# Altium PCB PBC2Asave.PcbDoc (part 1 of 2)
Units mm, origin at the board's own origin, x right, y up, seen from the top; angles counter-clockwise.
Board outline 55 x 64.5 mm, 2 copper layers (Top Layer, Bottom Layer); 77 components, 67 nets, 232 pads, 40 vias.
Unrouted connection lines stored in the file: 2.
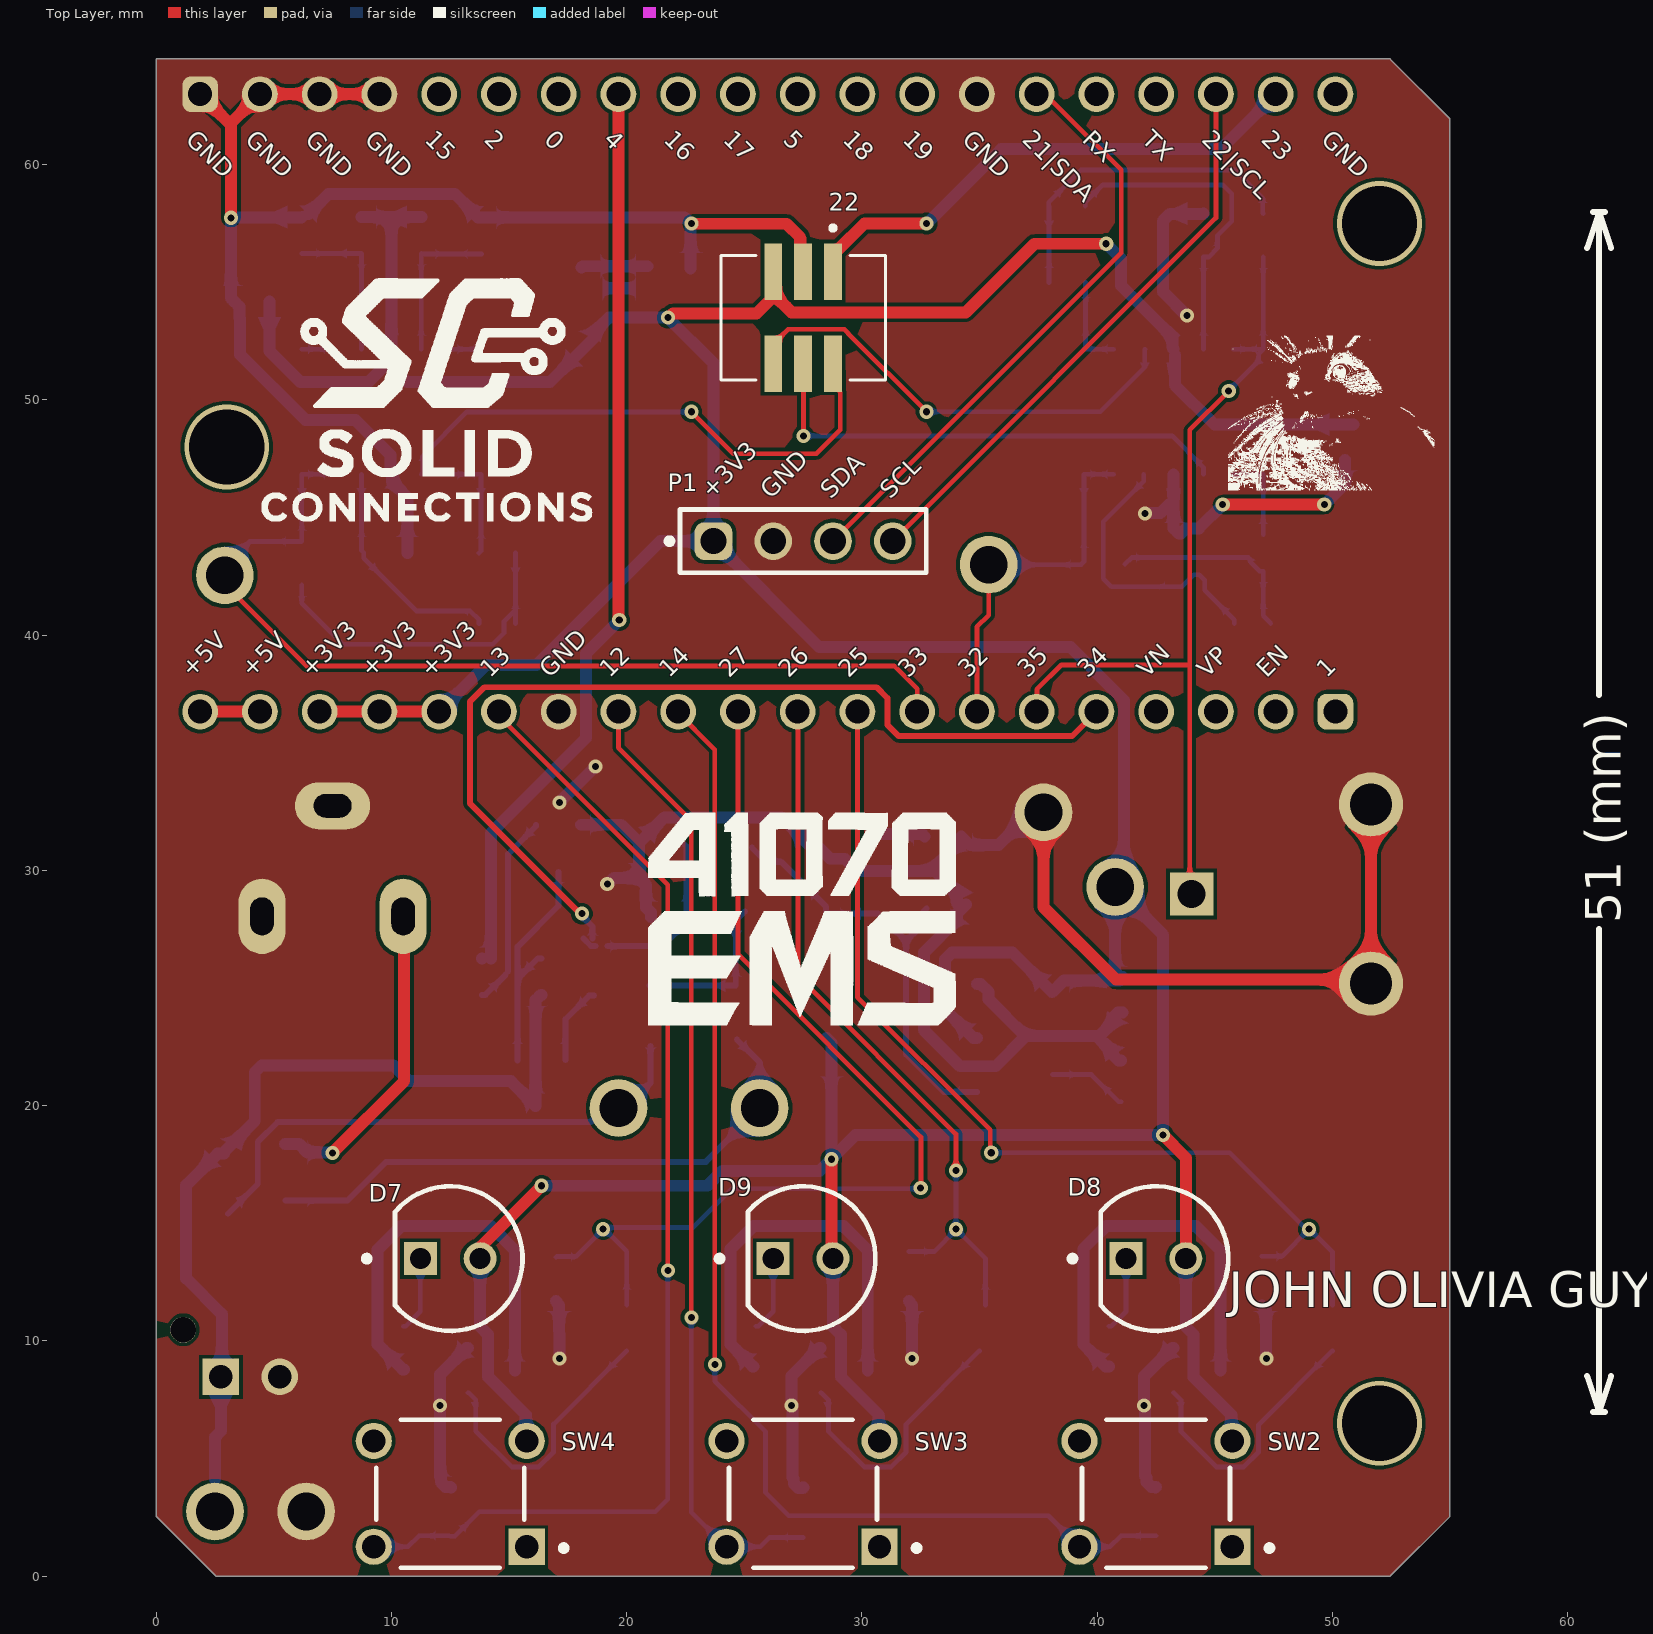
[diagram p0: Top Layer view]
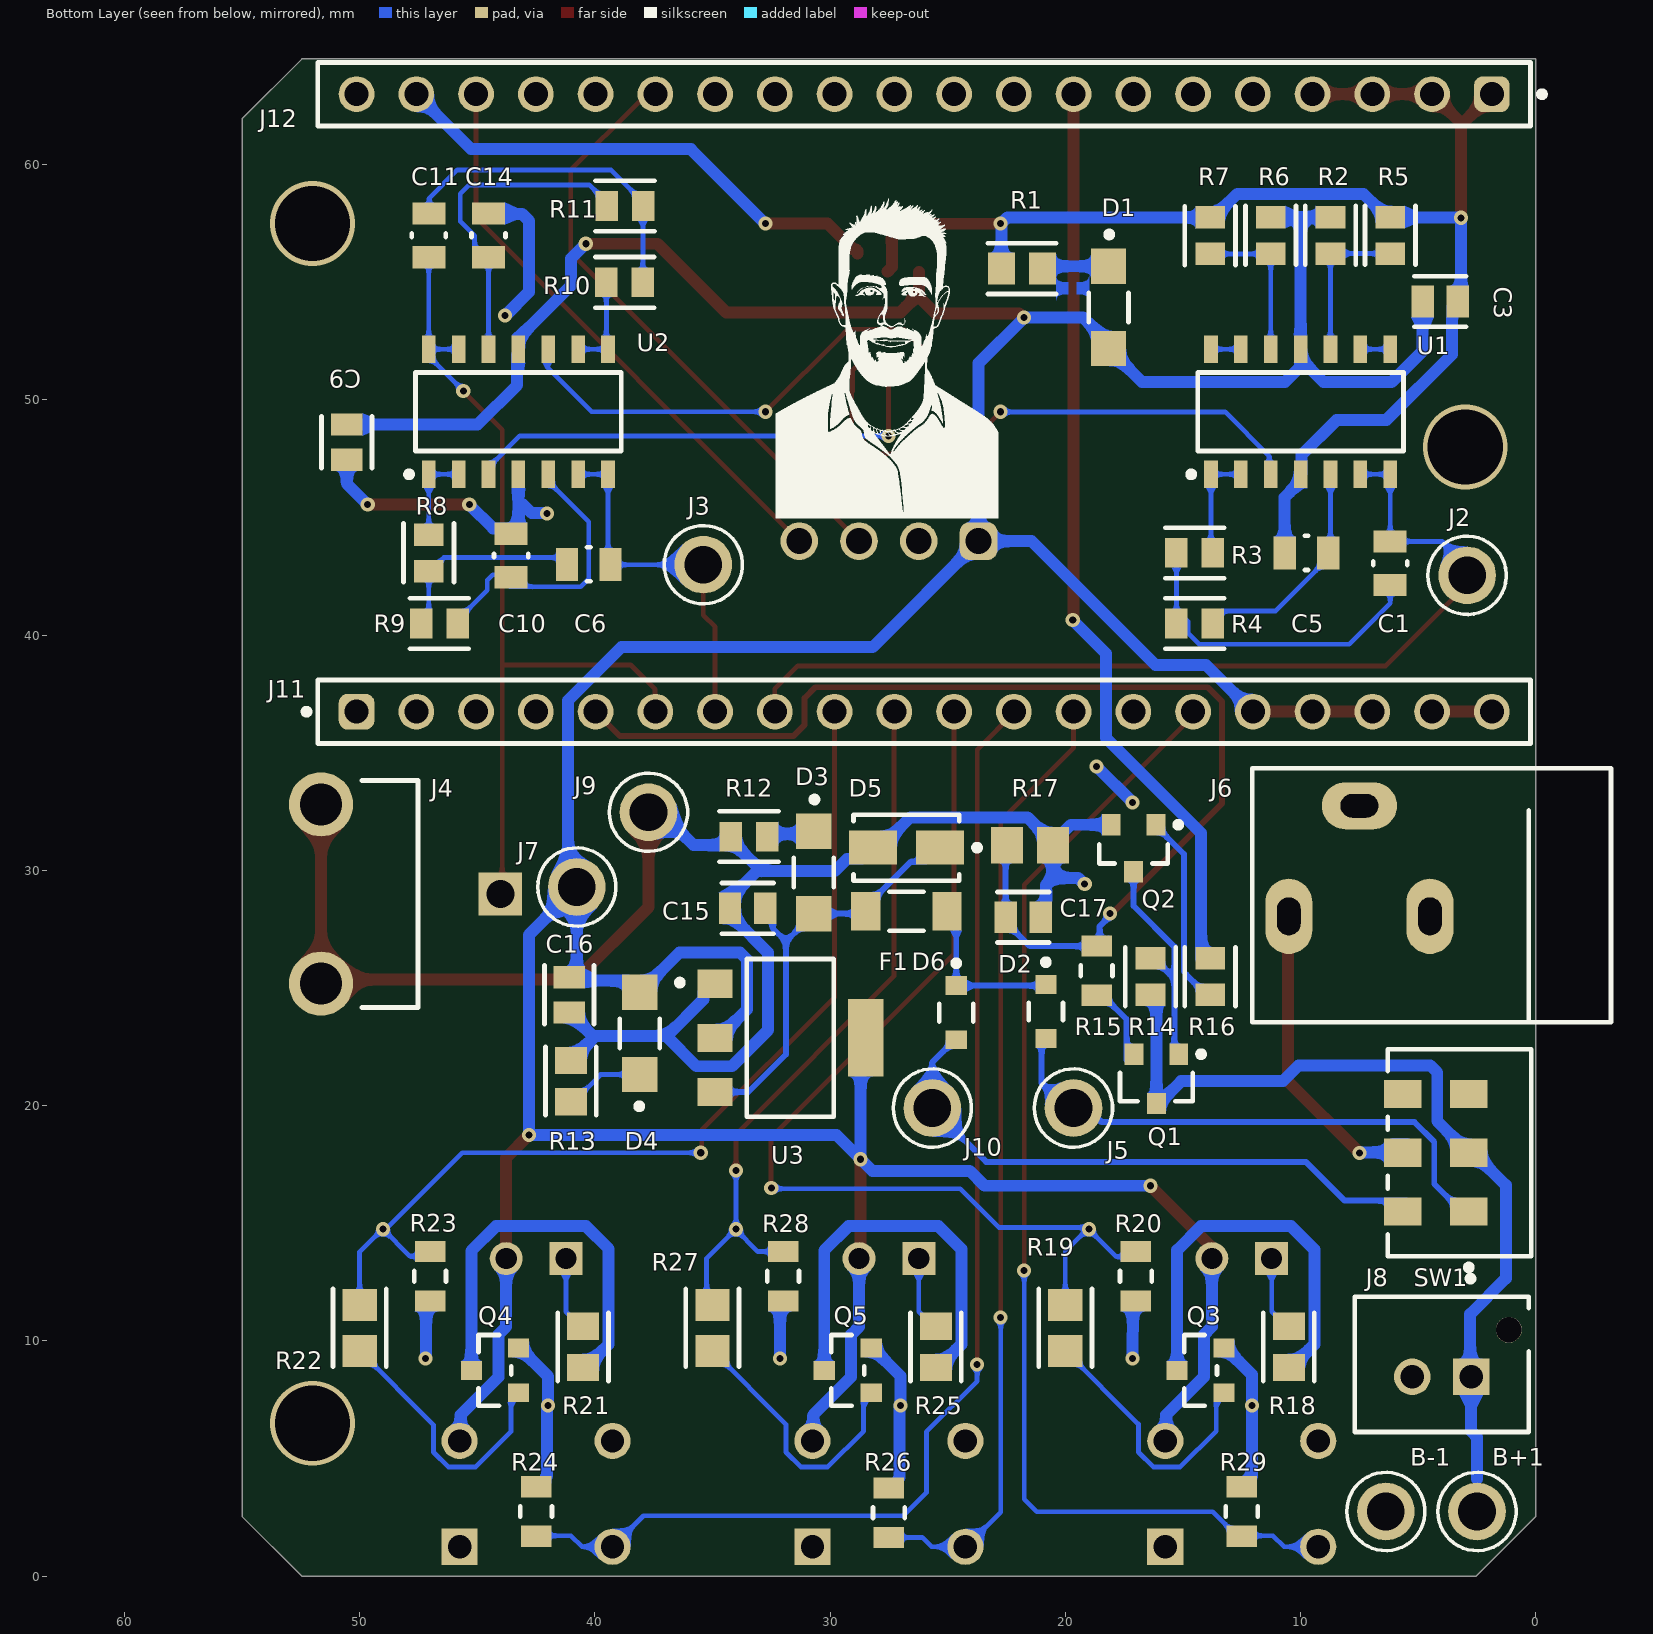
[diagram p1: Bottom Layer view, seen from below]
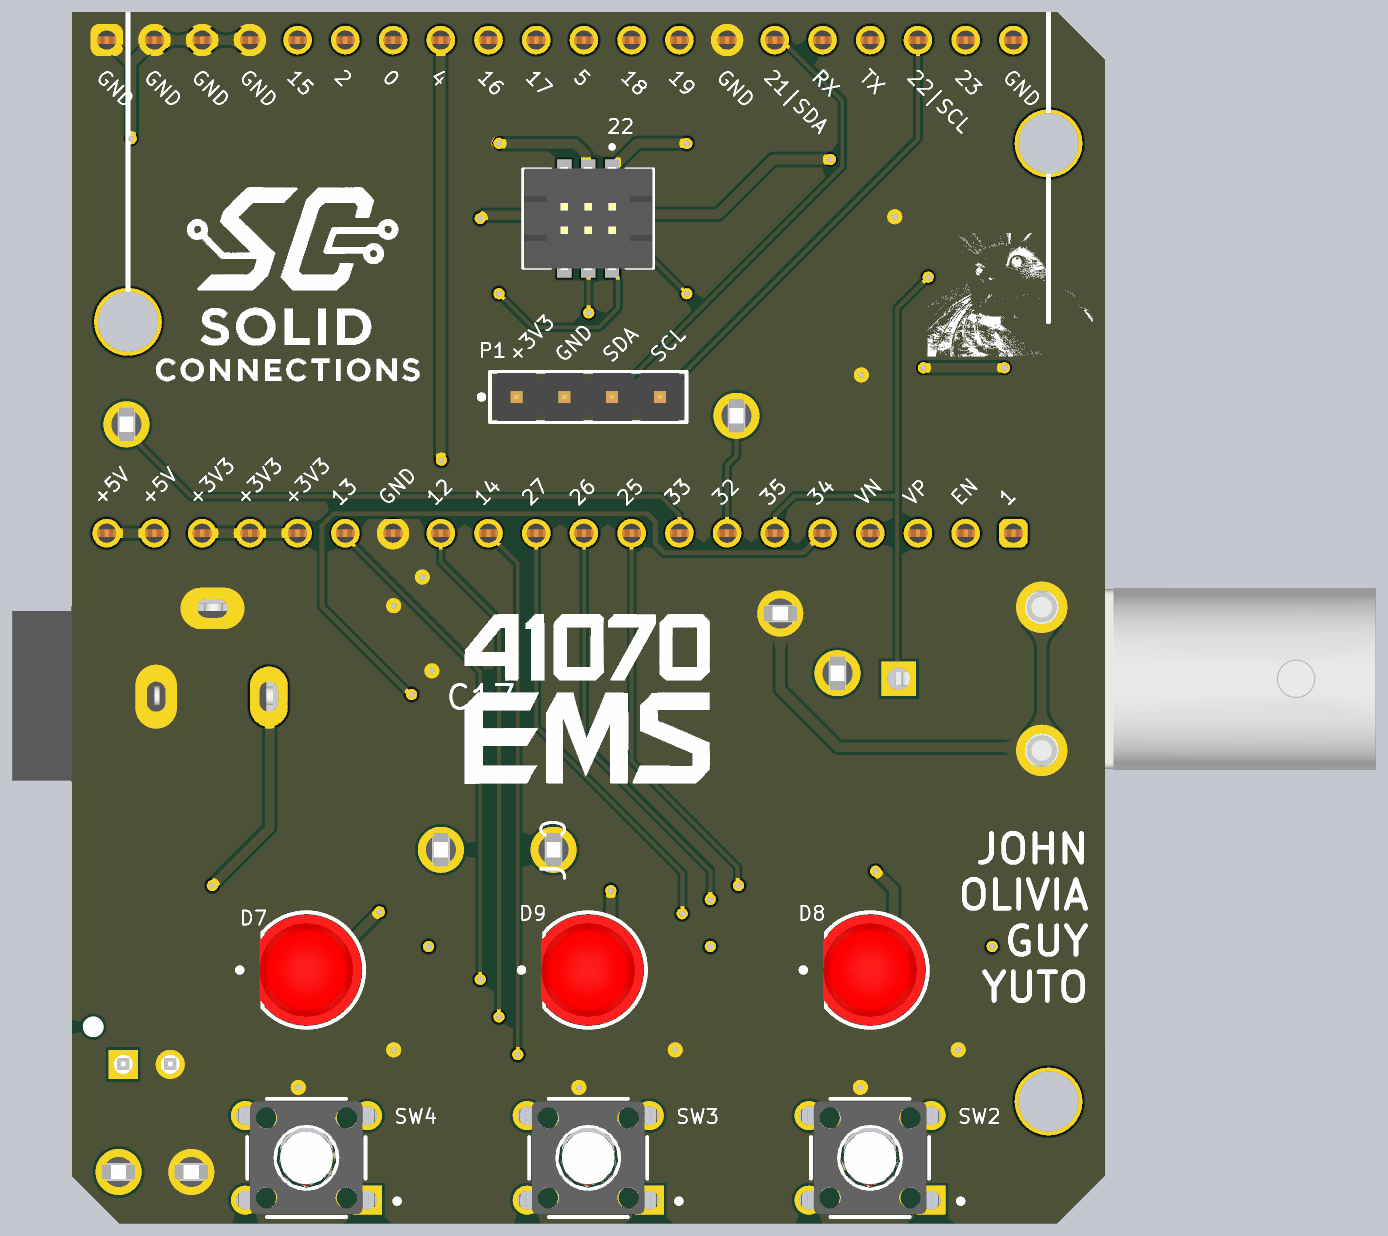
[diagram p2: 3D render of the assembled board from above, using the file's embedded part models]
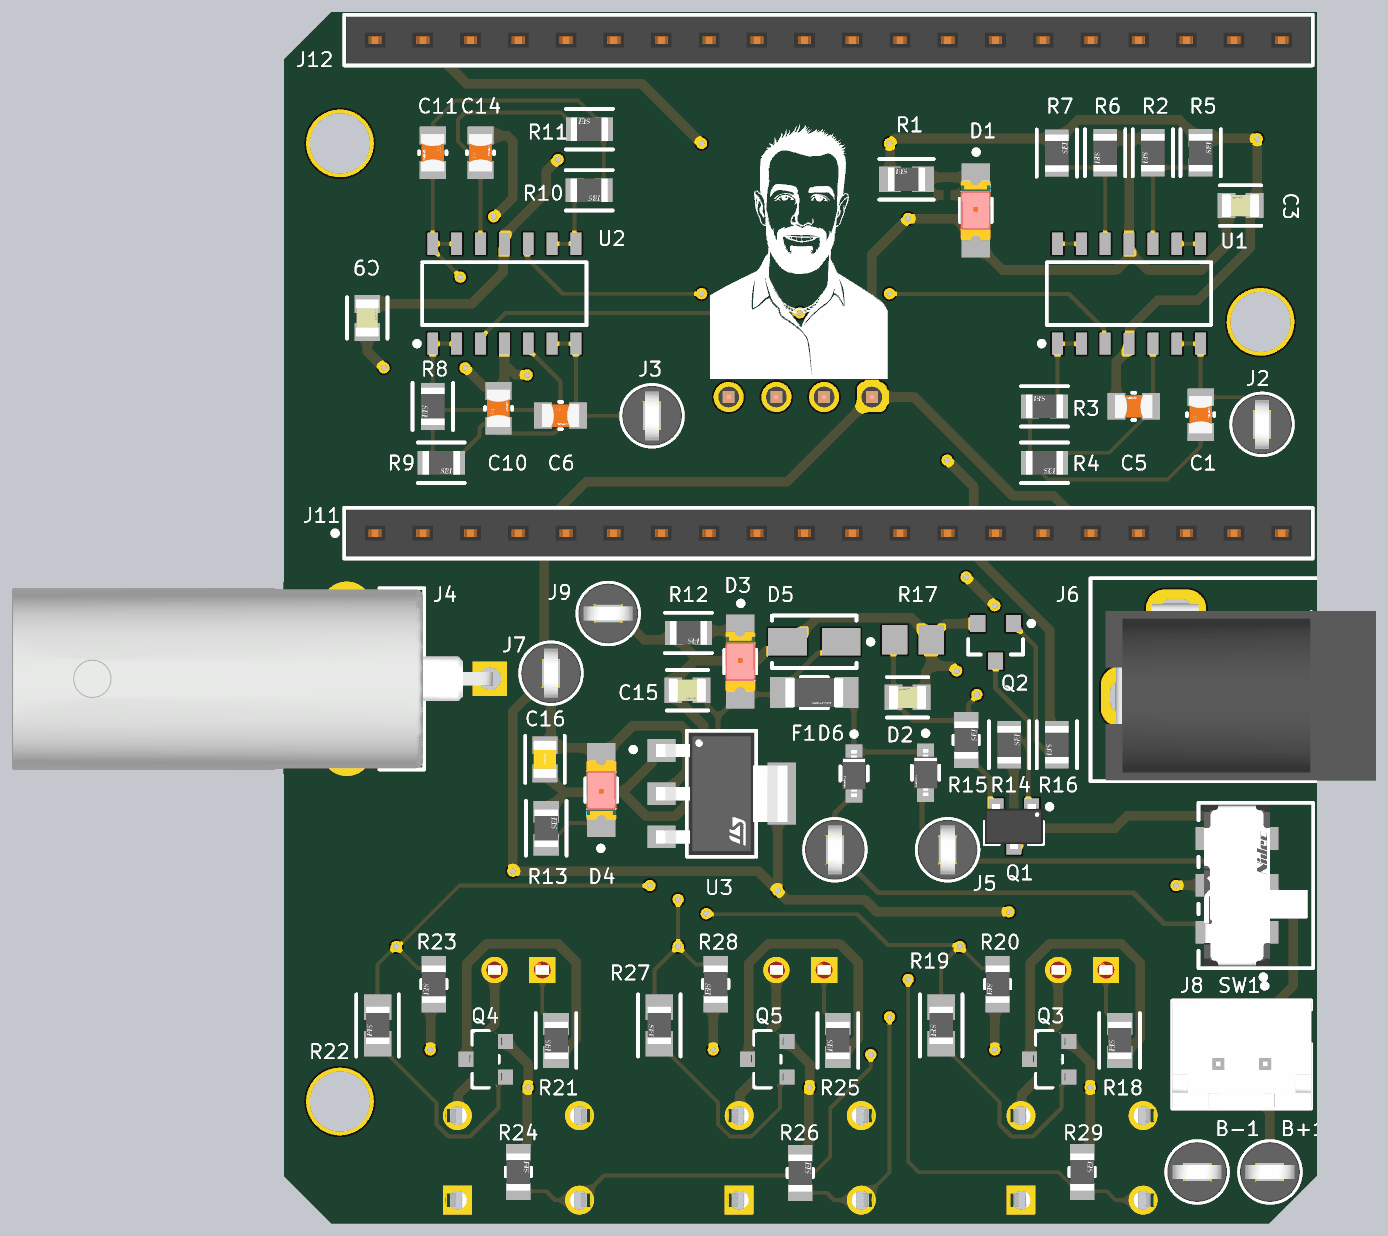
[diagram p3: 3D render of the assembled board from below, using the file's embedded part models]

## Layer stack, top to bottom
Top Solder: solder mask 0.0102, Solder Resist, Dk 3.5
Top Layer: signal copper 0.0356
Dielectric 1: dielectric 0.32, FR-4, Dk 4.8
Bottom Layer: signal copper 0.0356
Bottom Solder: solder mask 0.0102, Solder Resist, Dk 3.5

## Board outline
0,2.54 2.54,0 52.451,0 55,2.54 55,61.976 54.975,61.976 52.451,64.5 0,64.5

## Design rules (kind name [scope] priority, off if disabled: settings)
Clearance [All] p1: gap=0.152 ignorepadtopadclearanceinfootprint=FALSE
HoleSize [All] p1: absolutevalues=TRUE maxlimit=25.4 minlimit=0.2 maxpercent=80.000 minpercent=20.000
MinimumSolderMaskSliver [All] p1: minsoldermaskwidth=0.102
PolygonConnect PolygonConnect_9 [All vs IsNamedPolygon('GND_L01_P000')] p1: connectstyle=Direct reliefconductorwidth=0.254 reliefentries=4 polygonreliefangle="90 Angle" airgapwidth=0.254
PolygonConnect PolygonConnect_8 [All vs IsNamedPolygon('GND_L01_P001')] p2: connectstyle=Direct reliefconductorwidth=0.254 reliefentries=4 polygonreliefangle="90 Angle" airgapwidth=0.254
PolygonConnect PolygonConnect_7 [All vs IsNamedPolygon('GND_L01_P000')] p3: connectstyle=Relief reliefconductorwidth=0.254 reliefentries=4 polygonreliefangle="90 Angle" airgapwidth=0.254
PolygonConnect PolygonConnect_6 [All vs IsNamedPolygon('GND_L01_P004')] p4: connectstyle=Direct reliefconductorwidth=0.254 reliefentries=4 polygonreliefangle="90 Angle" airgapwidth=0.254
PolygonConnect PolygonConnect_5 [All vs IsNamedPolygon('GND_L01_P000')] p5: connectstyle=Direct reliefconductorwidth=0.254 reliefentries=4 polygonreliefangle="90 Angle" airgapwidth=0.254
PolygonConnect PolygonConnect_4 [All vs IsNamedPolygon('GND_L01_P000')] p6: connectstyle=Relief reliefconductorwidth=0.254 reliefentries=4 polygonreliefangle="90 Angle" airgapwidth=0.254
PolygonConnect PolygonConnect_3 [All vs IsNamedPolygon('GND_L01_P000')] p7: connectstyle=Direct reliefconductorwidth=0.254 reliefentries=4 polygonreliefangle="90 Angle" airgapwidth=0.254
PolygonConnect PolygonConnect_2 [All vs IsNamedPolygon('GND_L01_P000')] p8: connectstyle=Direct reliefconductorwidth=0.254 reliefentries=4 polygonreliefangle="90 Angle" airgapwidth=0.254
PolygonConnect PolygonConnect_1 [All vs IsNamedPolygon('GND_L01_P000')] p9: connectstyle=Direct reliefconductorwidth=0.254 reliefentries=4 polygonreliefangle="90 Angle" airgapwidth=0.254
PolygonConnect [All] p10: connectstyle=Relief reliefconductorwidth=0.254 reliefentries=4 polygonreliefangle="90 Angle" airgapwidth=0.254
RoutingCorners [All] p1: cornerstyle=45-Degree minsetback=0.254 maxsetback=0.254
RoutingVias [All] p1: holewidth=0.3 width=0.6 viastyle="Through Hole" minholewidth=0.3 minwidth=0.6 maxholewidth=0.3 maxwidth=0.6
SilkToSolderMaskClearance SilkscreenOverComponentPads [All] p1: minsilkscreentomaskgap=0.1 clearancetoexposedcopper=TRUE
SolderMaskExpansion [All] p1: expansion=0.102 istentingtop=FALSE
SupplyNets "Schematic Supply Nets_2" [InNet('+5V')] p1: voltage=0.000
SupplyNets "Schematic Supply Nets_1" [InNet('GND')] p2: voltage=0.000
SupplyNets "Schematic Supply Nets" [InNet('+3V3')] p3: voltage=0.000
Width "Width GND" [InNet('GND')] p1: maxlimit=0.508 minlimit=0.508 preferedwidth=0.508
Width "Width Power" [InNet('+3V3') OR InNetClass('PWR')] p2: maxlimit=0.508 minlimit=0.508 preferedwidth=0.508
Width [All] p3: maxlimit=0.508 minlimit=0.152 preferedwidth=0.203
26 further rules are at their usual default settings.

## Classes and differential pairs
component class "Top Level": J11 J12
component class Sheet4: C1 C3 C5 C6 C9 C10 C11 C14 J2 J3 J4 R2 R3 R4 R5 R6 R7 R8 R9 R10 R11 U1 U2
component class Sheet3: 22 D1 R1
component class Sheet2: B+1 B-1 C15 C16 C17 D2 D3 D4 D5 D6 F1 J5 J6 J7 J8 J9 J10 Q1 Q2 R12 R13 R14 R15 R16 R17 SW1 U3
component class r: D7 D8 D9 P1 Q3 Q4 Q5 R18 R19 R20 R21 R22 R23 R24 R25 R26 R27 R28 R29 SW2 SW3 SW4

## Components (designator, comment, footprint, x,y, rotation, side; value= is the part's Value field where it differs from the comment)
22 "20021221-00006C4LF" AMPHENOL_20021221-00006C4LF 27.5,53.5 r0 top (schematic designator J1)
B+1 "5006" FP-5006-MFG 2.5,2.75 r180 bottom
B-1 "5006" FP-5006-MFG 6.375,2.75 r180 bottom
C1 "33nF" FP-CC0805-0_85-MFG 6.19,43.061 r90 bottom value="33 nF"
C3 "0.1uF" FP-C0805C-DN-MFG 4.064,54.19 r180 bottom value="0.10 μF"
C5 "33nF" FP-CC0805-0_85-MFG 9.75,43.5 r0 bottom value="33 nF"
C6 "33nF" FP-CC0805-0_85-MFG 40.259,43.014 r180 bottom value="33 nF"
C9 "0.1uF" FP-C0805C-DN-MFG 50.546,48.209 r270 bottom value="0.10 μF"
C10 "33nF" FP-CC0805-0_85-MFG 43.561,43.395 r90 bottom value="33 nF"
C11 "33nF" FP-CC0805-0_85-MFG 47.06,57 r270 bottom value="33 nF"
C14 "33nF" FP-CC0805-0_85-MFG 44.52,57 r90 bottom value="33 nF"
C15 "0.1uF" FP-C0805C-DN-MFG 33.507,28.391 r0 bottom value="0.10 μF"
C16 "10uF" FP-C0805C106J8RACAUTO-MFG 41.09,24.714 r270 bottom
C17 "C0805C103J5RAC7210" FP-C0805C-DN-MFG 21.789,28.011 r180 bottom value="10,000 pF"
D1 "LTST-C150KRKT" FP-LTST-C150KRKT-MFG 18.161,53.936 r270 bottom
D2 "CUS08F30,H3F" FP-USC-MFG 20.828,24.003 r270 bottom
D3 "LTST-C150KRKT" FP-LTST-C150KRKT-MFG 30.691,29.916 r270 bottom
D4 "LTST-C150KRKT" FP-LTST-C150KRKT-MFG 38.09,23.075 r90 bottom
D5 "TVS" VISH-DO-214AC-2_L 26.754,30.969 r0 bottom
D6 "CUS08F30,H3F" FP-USC-MFG 24.638,23.957 r270 bottom
D7 "WP7113SURC" FP-WP7113SURC-MFG 12.5,13.5 r0 top
D8 "WP7113SURC" FP-WP7113SURC-MFG 42.5,13.5 r0 top
D9 "WP7113SURC" FP-WP7113SURC-MFG 27.5,13.5 r0 top
F1 "SF-1206S050-2" FP-SF-1206S-MFG 26.754,28.265 r0 bottom value=596mΩ
J2 "5006" FP-5006-MFG 2.921,42.545 r90 bottom
J3 "5006" FP-5006-MFG 35.39,43 r90 bottom
J4 "5414373-1" FP-5414373-1-MFG 58.5,29 r270 bottom
J5 "5006" FP-5006-MFG 19.656,19.9 r270 bottom
J6 "PJ-102AH" "CON Barrel PJ-102AH" 7.5,32.75 r0 bottom
J7 "5006" FP-5006-MFG 40.767,29.298 r90 bottom
J8 "B2B-XH-AM(LF)(SN)" FP-B2B-XH-AM_LF_SN-MFG 4,9 r180 bottom
J9 "5006" FP-5006-MFG 37.722,32.473 r0 bottom
J10 "5006" FP-5006-MFG 25.654,19.9 r270 bottom
J11 "61302011821" 61302011821 26,36.75 r180 bottom
J12 "61302011821" 61302011821 26,63 r0 bottom
P1 "61300411121" 61300411121 27.5,44 r0 top
Q1 "SSM3J328R,LF" TOSH-SOT-23F_V 16.129,21.141 r270 bottom
Q2 "MMBT3904LT1G" ONSC-SOT-23-3-318-08_V 17.102,30.943 r270 bottom
Q3 "DMN2004K-7" FP-SOT23-MFG 14.25,8.75 r0 bottom
Q4 "DMN2004K-7" FP-SOT23-MFG 44.25,8.75 r0 bottom
Q5 "DMN2004K-7" FP-SOT23-MFG 29.25,8.75 r0 bottom
R1 "300Ω" FP-RMCF0805-IPC_B 21.844,55.587 r0 bottom
R2 "100k" FP-RMCF0805-IPC_C 8.73,57 r270 bottom
R3 "100k" FP-RMCF0805-IPC_C 14.5,43.5 r0 bottom
R4 "100k" FP-RMCF0805-IPC_C 14.5,40.5 r180 bottom
R5 "100k" FP-RMCF0805-IPC_C 6.19,57 r90 bottom
R6 "100k" FP-RMCF0805-IPC_C 11.27,57 r270 bottom
R7 "100k" FP-RMCF0805-IPC_C 13.843,56.984 r90 bottom
R8 "100k" FP-RMCF0805-IPC_C 47.06,43.5 r270 bottom
R9 "100k" FP-RMCF0805-IPC_C 46.609,40.5 r180 bottom
R10 "100k" FP-RMCF0805-IPC_C 38.735,55 r180 bottom
R11 "100k" FP-RMCF0805-IPC_C 38.721,58.25 r0 bottom
R12 "RMCF0805JT3K00" FP-RMCF0805-IPC_C 33.448,31.44 r180 bottom
R13 "RMCF0805JT300R" FP-RMCF0805-IPC_B 41.021,21.043 r90 bottom
R14 "RMCF0805FG100K" FP-RMCF0805-IPC_C 16.383,25.488 r90 bottom
R15 "RMCF0805FT10K0" FP-RMCF0805-MFG 18.669,25.742 r90 bottom
R16 "RMCF0805FT1K00" FP-RMCF0805-IPC_C 13.843,25.488 r270 bottom
R17 "ERJ-6GEYJ563V" RESC2013X70X40ML20T20 21.504,31.076 r0 bottom
R18 "300Ω" FP-RMCF0805-IPC_B 10.5,9.75 r270 bottom
R19 "100Ω" FP-RMCF0805-IPC_A 20,10.551 r270 bottom
R20 "10k" FP-RMCF0805-MFG 17,12.75 r270 bottom
R21 "300Ω" FP-RMCF0805-IPC_B 40.5,9.75 r270 bottom
R22 "100Ω" FP-RMCF0805-IPC_A 50,10.551 r270 bottom
R23 "10k" FP-RMCF0805-MFG 47,12.75 r270 bottom
R24 "10k" FP-RMCF0805-MFG 42.5,2.75 r90 bottom
R25 "300Ω" FP-RMCF0805-IPC_B 25.5,9.75 r270 bottom
R26 "10k" FP-RMCF0805-MFG 27.5,2.695 r90 bottom
R27 "100Ω" FP-RMCF0805-IPC_A 35,10.551 r270 bottom
R28 "10k" FP-RMCF0805-MFG 32,12.75 r270 bottom
R29 "10k" FP-RMCF0805-MFG 12.5,2.75 r90 bottom
SW1 "CL-SB-22A-11T" FP-CL-SB-22A-11T-MFG 3.25,18 r90 bottom
SW2 "2-1825910-7" FP-2-1825910-7-MFG 42.5,3.5 r270 top
SW3 "2-1825910-7" FP-2-1825910-7-MFG 27.5,3.5 r270 top
SW4 "2-1825910-7" FP-2-1825910-7-MFG 12.5,3.5 r270 top
U1 "LM324DR2G" ONSC-SOIC-14-751A-03_V 10,49.5 r90 bottom
U2 "LM324DR2G" ONSC-SOIC-14-751A-03_V 43.25,49.5 r90 bottom
U3 "LD1117S33CTR" FP-SOT-223-0046067_14-MFG 31.689,22.883 r180 bottom

## Footprints (in the part's own frame and the unit in brackets; to place one, negate y for a bottom-side part, rotate by r counter-clockwise, add the part's x,y. Pads: shape width x height; smd on the part's side, far side on the other; paste and mask are expansions set on the pad)
61300411121 [mm] "Pin Header, pitch 2.54 mm, THT, Vertical, single row, 4p"
  rrect50% 1.6x1.6 hole 1.1: 1(-3.81,0)
  round 1.6 hole 1.1: 2(-1.27,0) 3(1.27,0) 4(3.81,0)
  silkscreen extent -5.8,-1.35 5.23,1.34, body extent -5.08,-1.27 5.08,1.27, height 8.57
61302011821 [mm] "Socket Header, Pitch 2.54 mm, THT, Vertical, single row, 20p"
  rrect50% 1.52x1.52 hole 1.02: 1(-24.13,0)
  round 1.52 hole 1.02: 2(-21.59,0) 3(-19.05,0) 4(-16.51,0) 5(-13.97,0) 6(-11.43,0) 7(-8.89,0) 8(-6.35,0) 9(-3.81,0) 10(-1.27,0) 11(1.27,0) 12(3.81,0) 13(6.35,0) 14(8.89,0) 15(11.43,0) 16(13.97,0) 17(16.51,0) 18(19.05,0) 19(21.59,0) 20(24.13,0)
  silkscreen extent -26.39,-1.35 25.78,1.35, body extent -25.65,-1.25 25.65,1.25, height 8.55
AMPHENOL_20021221-00006C4LF [mm]
  rect 0.76x2.4 smd: 1(1.27,1.95) 2(1.27,-1.95) 3(0,1.95) 4(0,-1.95) 5(-1.27,1.95) 6(-1.27,-1.95)
  silkscreen extent -3.5,-2.65 3.5,3.91, body extent -3.4,-2.75 3.4,2.75, height 5.6
"CON Barrel PJ-102AH" [mm] "5.5mm Barrel Plug (2.1mm ID)"
  oval 2x3.2 hole 1.6 slot 1 at 0 deg: 1(3,4.7) 2(-3,4.7)
  oval 3.2x2 hole 1 slot 1.6 at 0 deg: 3(0,0)
  silkscreen extent -10.7,-1.6 4.55,9.2, body extent -10.65,-0.25 3.75,9.15, height 11.01
FP-2-1825910-7-MFG [mm]
  rect 1.54x1.54 hole 0.99 paste-2539.97 mask+0: 1(2.25,3.25)
  round 1.54 hole 0.99 paste-2539.97 mask+0: 2(2.25,-3.25) 3(-2.25,3.25) 4(-2.25,-3.25)
  silkscreen extent -3.14,-3.14 3.15,4.95, body extent -3.24,-4.12 3.24,4.12, height 0.25
FP-5006-MFG [mm]
  round 2.45 hole 1.6 paste-2539.97 mask+0: 1(0,0)
  silkscreen extent -1.67,-1.66 1.66,1.66, body extent -1.58,-1.59 1.58,1.59, height 5.74
FP-5414373-1-MFG [mm]
  rect 1.84x1.84 hole 1.19 paste-2539.97 mask+0: 1(0,14.48)
  round 2.73 hole 1.78 paste-2539.97 mask+0: 2(-3.81,6.86) 3(3.81,6.86)
  silkscreen extent -4.83,8.6 4.83,10.98, body extent -4.83,-10.92 4.83,14.63, height 9.34
FP-B2B-XH-AM_LF_SN-MFG [mm]
  rect 1.55x1.55 hole 1 paste-2539.97 mask+0: 1(1.25,-0.525)
  round 1.55 hole 1 paste-2539.97 mask+0: 2(-1.25,-0.525)
  round 1.1 hole 1.1 unplated paste-2539.97 mask+0: ""(2.85,1.475)
  silkscreen extent -3.7,-2.88 3.7,3.77, body extent -3.7,-2.88 3.7,2.88, height 7
FP-C0805C106J8RACAUTO-MFG [mm]
  rect 0.95x1.35 smd paste+0 mask+0: 1(-0.75,0) 2(0.75,0)
  silkscreen extent -1.25,-1.05 1.25,1.05, body extent -1,-0.63 1,0.63, height 1.45
FP-C0805C-DN-MFG [mm]
  rect 0.95x1.35 smd paste+0 mask+0: 1(-0.75,0) 2(0.75,0)
  silkscreen extent -1.1,-1.07 1.1,1.07, body extent -1,-0.63 1,0.63, height 0.88
FP-CC0805-0_85-MFG [mm]
  rect 0.95x1.4 smd paste+0 mask+0: 1(-0.925,0) 2(0.925,0)
  silkscreen extent -0.07,-0.73 0.08,0.72, body extent -1,-0.63 1,0.63, height 0.95
FP-CL-SB-22A-11T-MFG [mm]
  rect 1.2x1.6 smd paste+0 mask+0: 1(-2.5,-0.4) 2(0,-0.4) 3(2.5,-0.4) 4(-2.5,2.4) 5(0,2.4) 6(2.5,2.4)
  silkscreen extent -5,-3.05 4.4,3.05, body extent -4.25,-2.75 4.25,2.75, height 3.8
FP-LTST-C150KRKT-MFG [mm]
  rect 1.5x1.5 smd paste+0 mask+0: 1(-1.75,0) 2(1.75,0)
  silkscreen extent -3.22,-0.85 0.62,0.85, body extent -1.6,-0.8 1.6,0.8, height 1.2
FP-RMCF0805-IPC_A [mm]
  rect 1.355x1.462 smd paste+0 mask+0: 1(-0.976,0) 2(0.976,0)
  silkscreen extent -1.65,-1.13 1.65,1.13, body extent -1,-0.63 1,0.63, height 0.65
FP-RMCF0805-IPC_B [mm]
  rect 1.155x1.362 smd paste+0 mask+0: 1(-0.876,0) 2(0.876,0)
  silkscreen extent -1.45,-1.08 1.45,1.08, body extent -1,-0.63 1,0.63, height 0.65
FP-RMCF0805-IPC_C [mm]
  rect 0.955x1.262 smd paste+0 mask+0: 1(-0.776,0) 2(0.776,0)
  silkscreen extent -1.25,-1.07 1.25,1.08, body extent -1,-0.63 1,0.63, height 0.65
FP-RMCF0805-MFG [mm]
  rect 0.9x1.3 smd paste+0 mask+0: 1(-1.05,0) 2(1.05,0)
  silkscreen extent -0.23,-0.67 0.22,0.67, body extent -1,-0.63 1,0.63, height 0.65
FP-SF-1206S-MFG [mm]
  rect 1.25x1.65 smd paste+0 mask+0: 1(-1.725,0) 2(1.725,0)
  silkscreen extent -0.73,-0.82 0.73,0.82, body extent -1.55,-0.77 1.55,0.77, height 0.7
FP-SOT23-MFG [mm]
  rect 0.9x0.8 smd paste+0 mask+0: 1(-1,0.95) 2(-1,-0.95) 3(1,0)
  silkscreen extent -0.7,-1.5 0.7,1.5, body extent -1.2,-1.46 1.2,1.44, height 1.1
FP-SOT-223-0046067_14-MFG [mm]
  rect 1.5x1.2 smd paste+0 mask+0: 1(-3.2,2.3) 2(-3.2,0) 3(-3.2,-2.3)
  rect 1.5x3.3 smd paste+0 mask+0: 4(3.2,0)
  silkscreen extent -4.83,-3.35 1.85,3.35, body extent -3.5,-3.25 3.5,3.25, height 1.9
FP-USC-MFG [mm]
  rect 0.8x0.9 smd paste+0 mask+0: 1(-1.15,0) 2(1.15,0)
  silkscreen extent -2.22,-0.73 0.38,0.72, body extent -1.25,-0.63 1.25,0.63, height 1.15
FP-WP7113SURC-MFG [mm]
  rect 1.4x1.4 hole 0.9 paste-2539.97 mask+0: 1(-1.27,0)
  round 1.4 hole 0.9 paste-2539.97 mask+0: 2(1.27,0)
  silkscreen extent -3.67,-3.07 3.07,3.07, body extent -2.5,-2.95 2.94,2.95, height 9.85
ONSC-SOIC-14-751A-03_V [mm] "SOIC, 14-Leads, Body 8.75x4mm, Pitch 1.27mm"
  rect 1.18x0.58 smd: 1(-2.66,3.81) 2(-2.66,2.54) 3(-2.66,1.27) 4(-2.66,0) 5(-2.66,-1.27) 6(-2.66,-2.54) 7(-2.66,-3.81) 8(2.66,-3.81) 9(2.66,-2.54) 10(2.66,-1.27) 11(2.66,0) 12(2.66,1.27) 13(2.66,2.54) 14(2.66,3.81)
  silkscreen extent -2.78,-4.38 1.67,4.78, body extent -2,-4.38 2,4.38, height 1.75
ONSC-SOT-23-3-318-08_V [mm] "SOT23, 3-Leads, Body 2.92x1.3mm, Pitch 0.95mm"
  rect 0.9x0.8 smd: 1(-1,0.95) 2(-1,-0.95) 3(1,0)
  silkscreen extent -1.12,-1.46 0.65,2.02, body extent -0.65,-1.46 0.65,1.46, height 1.11
RESC2013X70X40ML20T20 [mm] "Chip Resistor, 2-Leads, Body 2.00x1.25mm, IPC Low Density"
  rect 1.35x1.55 smd: 1(-0.975,0) 2(0.975,0)
  body extent -1.1,-0.72 1.1,0.72, height 0.7
TOSH-SOT-23F_V [mm] "SOTFL, 3-Leads, Body 3.1x1.9mm, Pitch 0.95mm"
  rect 0.9x0.8 smd: 1(-1.05,0.95) 2(-1.05,-0.95) 3(1.05,0)
  silkscreen extent -1.17,-1.55 0.95,2.02, body extent -1.2,-1.55 1.2,1.55, height 0.88
VISH-DO-214AC-2_L [mm] "DO-214AC, 2-Leads, Body 4.5x2.79mm, IPC High Density"
  rect 2.05x1.45 smd: 1(-1.425,0) 2(1.425,0)
  silkscreen extent -3.12,-1.4 2.25,1.4, body extent -2.25,-1.4 2.25,1.4, height 2.29

## Part data
22: Package=None, Availability=Unavailable, MF="Amphenol ICC", MP=20021221-00006C4LF, Price=None
B+1 B-1 J2 J3 J5 J7 J9 J10: library part CMP-19636-000022-1, "PC TEST POINT COMPACT BLACK", Color=Black, Flammability Rating="UL94 V-0", Package Quantity=100, Body Material=Bronze, Contact Material=Bronze, Contact Plating=Tin, Height=0.35inch, Hole Diameter=1.6mm, Housing Color=Black, Inside Diameter=1.78mm, Insulation Material=Nylon, Lead Free="Lead Free", Length=8.89mm, Material=Nylon, Mount=PCB, Number of Ports=1, Orientation=Straight, Outside Diameter=3.18mm, Packaging=Bulk, Plating=Silver, REACH SVHC="No SVHC", RoHS Compliant=Yes, Series=THM
C1 C5 C6 C10 C11 C14: library part CMP-03422-000099-1, "CAP CER 0.033UF 50V X7R 0805, CC0805KRX7R9BB333", Capacitance="33 nF", Manufacturer=Yageo, Manufacturer Part Number=CC0805KRX7R9BB333, Package=CC0805-0.85, Temperature="-30°C to +85°C", Temperature Characteristic=X7R, Temperature Range High=+85°C, Temperature Range Low=-30°C, Tolerance=0.1, Voltage Rating="50 V", Automotive=No, Category=Cap, ComponentLink2Description=Datasheet, ComponentLink2URL=http://www.yageo.com/documents/recent/UPY-GPHC_Y5V_6.3V-to-50V_8.pdf, Device Class L1="Passive Components", Device Class L2=Capacitors, Device Class L3="Ceramic Capacitors", Digikey Description="CAP CER 0.033UF 50V X7R 0805", Footprint Url=http://www.yageo.com/exep/pages/download/literatures/UPY-C_GEN_24.pdf, Height=0.95mm, Ipc Land Pattern Name=CAPC200125X85, Lead Free=Yes, Material=Ceramic, Mouser Description="Multilayer Ceramic Capacitors MLCC - SMD/SMT 33nF 50V X7R 10%", Octopart=https://octopart.com/cc0805krx7r9bb333-yageo-42333931, RoHS=TRUE
C3 C9 C15: library part CMP-03020-000950-1, "CAP CER 0.1UF 50V X7R 0805", Capacitance="0.10 μF", Manufacturer=KEMET, Manufacturer Part Number=C0805C104J5RACTU, Package=C0805C-DN, Temperature="-55°C to +125°C", Temperature Characteristic=X7R, Temperature Coefficient=30ppm/°C, Temperature Range High=+125°C, Temperature Range Low=-55°C, Tolerance=0.05, Voltage Rating="50 V", Automotive=No, Category=Cap, ComponentLink2Description=Datasheet, ComponentLink2URL=https://content.kemet.com/datasheets/KEM_C1003_C0G_SMD.pdf, Device Class L1="Passive Components", Device Class L2=Capacitors, Device Class L3="Ceramic Capacitors", Digikey Description="CAP CER 0.1UF 50V X7R 0805", Height=0.88mm, Ipc Land Pattern Name=CAPC200125X78, Lead Free=Yes, Material=Ceramic, Mouser Description="Multilayer Ceramic Capacitors MLCC - SMD/SMT 50volts 0.1uF X7R 5%", Octopart=https://octopart.com/c0805c104j5ractu-kemet-104634, RoHS=TRUE
C16: library part CMP-03020-034708-1, "CAP CER 10UF 10V X7R 0805", Case Code (Imperial)=0805, Case Code (Metric)=2012, Max Operating Temperature=125°C, Min Operating Temperature=-55°C, Ratings=AEC-Q200, Tolerance=5%, Voltage Rating=10V, Capacitance=10uF, Case/Package=0805, Mount="Surface Mount", Packaging="Tape and Reel", RoHS Compliant=Yes
C17: library part CMP-2007-01173-3, "CAP CER SMD 0805 .01UF X7R 5% 50", Capacitance="10,000 pF", Manufacturer=KEMET, Package=C0805C-DN, Temperature="-55°C to +125°C", Temperature Characteristic=X7R, Temperature Coefficient=30ppm/°C, Temperature Range High=+125°C, Temperature Range Low=-55°C, Tolerance=0.05, Voltage Rating="50 V", Automotive=No, Category=Cap, ComponentLink2Description=Datasheet, ComponentLink2URL=https://content.kemet.com/datasheets/KEM_C1003_C0G_SMD.pdf, Device Class L1="Passive Components", Device Class L2=Capacitors, Device Class L3="Ceramic Capacitors", Digikey Description="CAP CER SMD 0805 .01UF X7R 5% 50", Height=0.88mm, Ipc Land Pattern Name=CAPC200125X78, Lead Free=Yes, Manufacturer Part Number=C0805C103J5RAC7210, Material=Ceramic, Mouser Description="Cap Ceramic 0.01uF 50V X7R 5% Pad SMD 0805 125C T/R", Octopart=https://octopart.com/c0805c103j5rac7210-kemet-3921106, RoHS=TRUE
D1 D3 D4: library part CMP-2000-06617-2, "LED RED CLEAR 1206 SMD", Case Code (Imperial)=1206, Case Code (Metric)=3216, Color=Red, Forward Current=30mA, Forward Voltage=2V, Lens Color=Colorless, Max Operating Temperature=85°C, Min Operating Temperature=-30°C, Package Quantity=1, Power Dissipation=62.5mW, Power Rating=75mW, Reverse Voltage=5V, Test Current=20mA, Case/Package=1206, Depth=1.6mm, Dominant Wavelength=631nm, Height=1.1mm, Illumination Color=Red, Lead Free="Lead Free", Length=3.2mm, Lens Style=Diffused, Lens Transparency=Clear, Luminous Intensity=54mcd, Mount="Surface Mount", Number of Elements=1, Number of LEDs=1, Number of Pins=2, Packaging="Tape and Reel", Radiation Hardening=No, Viewing Angle=130°, Wavelength=639nm, Width=1.6mm
D2 D6: library part CMP-00375-53632863-1, "CUS08F30,H3F Rectifier Diode, Schottky, 1 Phase, 1 Element, 0.8A, 30V V(RRM), Silicon", Average Rectified Current=800mA, Capacitance=170pF, Case/Package=SOD, Max Forward Surge Current (Ifsm)=5A, Max Junction Temperature (Tj)=125°C, Max Repetitive Reverse Voltage (Vrrm)=30V, Min Operating Temperature=-55°C, Peak Reverse Current=50µA, Contact Plating="Silver, Tin", Element Configuration=Single, Forward Current=800mA, Height=1.15mm, Max Operating Temperature=125°C, Max Reverse Voltage (DC)=30V, Mount="Surface Mount", NexarPartId=53632863, Number of Pins=2, Packaging=Digi-Reel®, Peak Non-Repetitive Surge Current=5A, Reverse Voltage=30V, RoHS=Compliant, Schedule B="8541100080, 8541100080"
D5: library part CMP-0548-00238-2, "Transient Voltage Suppressor, 6.40 to 231 V, 10 V Stand-off Voltage, Uni-Directional, -55 to 155 degC, 2-pin DO-214AC, Pb-Free, Tape and Reel", Manufacturer="Vishay Semiconductor", Operating Junction and Storage Temperature Range="-55 to 150 degC", PartNumber=SMAJ10A-E3/61, ComponentLink1Description="Manufacturer URL", ComponentLink1URL=http://www.vishay.com/, ComponentLink2Description=Datasheet, ComponentLink2URL=http://www.vishay.com/docs/88390/smaj50a.pdf, ComponentLink3Description="Package Specification", ComponentLink3URL=http://www.vishay.com/docs/88390/smaj50a.pdf, DatasheetVersion=12/8/2013, ID (uA)=1, IFSM="40 A", Mounting Technology="Surface Mount", PackageDescription="2-Pin DO-214AC (SMA), Body 4.245 x 2.665 mm", PackageReference=DO-214AC-2, Packing="Tape and Reel", PPPM (W)="400, 300", RoHS=TRUE, VBR Uni-Directional (V)="6.4 to 231", VWM (V)=10
D7 D8 D9: library part CMP-00682-00869413-1, "WP7113SURC Red 5 mm 20 º Water Clear 3800 mcd 1.9 V Solid State LED Lamp - T-1 3/4", Case/Package=Radial, Color=Red, Forward Current=20mA, Forward Voltage=1.9V, Max Junction Temperature (Tj)=115°C, Max Operating Temperature=85°C, Min Operating Temperature=-40°C, Power Dissipation=75mW, Reverse Voltage=5V, Dominant Wavelength=630nm, Height=8.6mm, Illumination Color=Red, Lead Free="Lead Free", Lens Style="Clear, Dome", Luminous Intensity=1.4cd, Mount="Through Hole", NexarPartId=869413, Packaging=Bulk, RoHS=Compliant, Test Current=20mA, Viewing Angle=20°, Wavelength=628nm
F1: library part CMP-07399-000002-1, "FUSE BOARD MNT 500MA 63VDC 1206", Fuse Current=0.5A, Fuse Interrupt Dc Current=50A, Manufacturer=Bourns, Max Fuse Dc Voltage=63V, Package=SF-1206S, Resistance=596mΩ, Temperature="-20°C to +105°C", Temperature Range High=+105°C, Temperature Range Low=-20°C, Automotive=No, Category=Fuse, ComponentLink2Description=Datasheet, ComponentLink2URL=https://www.bourns.com/docs/product-datasheets/sf-1206s.pdf?sfvrsn=e6b376e3_33, Device Class L1="Circuit Protection", Device Class L2=Fuses, Device Class L3=unset, Digikey Description="FUSE BOARD MNT 500MA 63VDC 1206", Fuse Blow Speed=Slow, Fuse I2T=0.03A2Sec, Height=0.7mm, Ipc Land Pattern Name=CAPC310155X60, Lead Free=Yes, Manufacturer Part Number=SF-1206S050-2, Mouser Description="Fuse Chip Slow Blow Acting 0.5A 63V SMD Solder Pad 1206 T/R UL", Octopart=https://octopart.com/sf-1206s050-2-bourns-8398336, RoHS=TRUE, Voltage Rating=63V
J4: library part CMP-03357-000008-1, "CONN BNC JACK R/A 50 OHM PCB", Dielectric Material=Polymethylpentene, Frequency=4GHz, Housing Color=Silver, Insulation Resistance=5GR, Max Operating Temperature=85°C, Min Operating Temperature=-55°C, Operating Frequency="0 to 4 GHz", Package Quantity=50, Voltage Rating=500V, Body Material=Zinc, Body Plating=Nickel, Center Contact Plating=Gold, Connector Type=BNC, Contact Material=Bronze, Contact Plating=Gold, Fastening Type=Bayonet, Gender=Female, Impedance=50R, Insulation Material=Polymethylpentene, Length=25.4mm, Mating Cycles=500, Max Frequency=4GHz, Mount="Through Hole", Number of Ports=1, Number of Positions=1, Orientation="Right Angle", Packaging=Tray, PCB Mount Retention=Without, PCB Mounting Orientation="Right Angle", Polarity=Standard, Radiation Hardening=No, Sealable="No (Without)", Series=-, Termination="Through Hole", Wire/Cable Type=Coaxial
J6: library part "CON PWR PJ-102AH", "Power Barrel Con, 2.0mm ID, 5.5mm OD, 5A", Manufacturer="CUI Devices", Digikey Order=CP-102AH-ND, Manufacturer Code=PJ-102AH, Supplier 1="Arrow Electronics", Supplier Part Number 1=PJ-102AH
J8: library part CMP-17439-000037-1, "CONN HEADER VERT 2POS 2.5MM", Color=Green, Contact Resistance=20mR, Housing Color=White, Max Current Rating=3A, Max Operating Temperature=85°C, Max Voltage Rating (AC)=250V, Min Operating Temperature=-25°C, Connector Type="Male Pin", Contact Material=Brass, Contact Plating=Tin, Contact Type="Male Pin", Depth=5.75mm, Fastening Type=Detent, Housing Material=Polyamide, Lead Free="Lead Free", Length=7.4mm, Mount="Through Hole", Number of Positions=2, Number of Rows=1, Orientation=Straight, Packaging=Bulk, Pitch=2.5mm, Series=XH, Termination=Solder
J11 J12: library part CMP-1502-01348-3, Contact Resistance=20mΩ, Current Rating=3A, Operating Supply Voltage=250V, Gender=Female, Lead Pitch=2.54mm, NexarPartId=61924744, Number of Pins=20, Orientation=Vertical, RoHS=Non-Compliant
P1: library part CMP-1502-01064-3, Color=Black, Contact Resistance=20mΩ, Current Rating=3A, Max Operating Temperature=105°C, Min Operating Temperature=-40°C, Operating Supply Voltage=250V, Connector Type="Male Pin", Contact Material=Copper, Contact Mating Length=5.9944mm, Contact Plating=Gold, Gender=Male, Height=8.89mm, Lead Free="Lead Free", Lead Pitch=2.54mm, Mount="Through Hole", NexarPartId=32855522, Number Of Contacts=4, Number of Pins=4, Number of Positions=4, Number of Rows=1, Orientation=Vertical, Packaging=Bulk, Pitch=2.54mm, REACH SVHC=Unknown, RoHS=Compliant, Termination=Solder, Voltage Rating=250V
Q1: library part CMP-2100-03686-1, "TOSHIBA Field-Effect Transistor Silicon P-Channel MOS Type (U-MOS VI), 20 V, -55 to 125 degC, 3-Pin SOTFL, RoHS, Tape and Reel", Case/Package=SOT-23-3, Continuous Drain Current (ID)=6A, Drain To Source Breakdown Voltage=-20V, Drain To Source Resistance=47.4mOhm, Drain to Source Voltage (Vdss)=20V, Gate to Source Voltage (Vgs)=8V, Input Capacitance=840pF, Manufacturer=Toshiba, Max Operating Temperature=150degC, Max Power Dissipation=1W, Min Operating Temperature=-55degC, Package Description="3-Pin Small Outline Transistor, Flat Lead, Body 2.9 x 1.8 mm, Pitch 0.95 mm", Package Quantity=3000, Package Reference=SOT-23F, Power Dissipation=2W, Datasheet URL=https://toshiba.semicon-storage.com/info/docget.jsp?did=2429&prodName=SSM3J328R, Datasheet Version=41699.0, Element Configuration=Single, Manufacturer URL=http://www.toshiba.com/, Mount=SurfaceMount, Number Of Channels=1, Number of Elements=1, Number of Pins=3, Package URL=https://toshiba.semicon-storage.com/ap-en/design-support/package/detail.SOT-23F.html, Packaging=TapeandReel, Radiation Hardening=No, Rds On Max=29.8mOhm, RoHSCompliant=true, Turn-Off Delay Time=107ns, Turn-On Delay Time=32ns
Q2: library part CMP-1048-00631-1, "General Purpose Transistor, NPN Silicon, 3-Pin SOT-23, Pb-Free, Tape and Reel", Manufacturer="On Semiconductor", ComponentLink1Description="Manufacturer URL", ComponentLink1URL=http://www.onsemi.com/, ComponentLink2Description=Datasheet, ComponentLink2URL=http://www.onsemi.cn/pub_link/Collateral/MMBT3904LT1-D.PDF, ComponentLink3Description="Package Specification", ComponentLink3URL=http://www.onsemi.cn/pub_link/Collateral/318-08.PDF, DatasheetVersion="Rev. 12", fT Min (MHz)=300, IC Continuous (A)=0.2, Mounting Technology="Surface Mount", PackageDescription="3-Pin Small Outline Transistor, Body 2.92 x 1.3 mm, Pitch 0.95 mm", PackageReference=SOT-23-3-318-08, PackageVersion="Rev. AP, 11/2009", Packing="Tape and Reel", PartNumber=MMBT3904LT1G, Polarity=NPN, RoHS=TRUE
Q3 Q4 Q5: library part CMP-12801-000057-1, "MOSFET N-CH 20V 0.63A SOT23-3", Continuous Drain Current=630mA, Drain To Source Breakdown Voltage=20V, Drain To Source Resistance=0.4Ω, Gate To Source Voltage=8V, Input Capacitace At Vds="150pF @ 16V", Manufacturer="Diodes Inc.", Max Forward Diode Voltage=1V, Max Junction Temp=+150°C, Package=SOT23, Power Dissipation=350mW, Pulse Drain Current=1.5A, Temperature="-65°C to +150°C", Temperature Range Low=-65°C, Automotive=Yes, Automotive Grade="Grade 0", Category=Trans, ComponentLink2Description=Datasheet, ComponentLink2URL=https://www.diodes.com/assets/Datasheets/ds30938.pdf, Depletion Mode=False, Device Class L1="Discrete Semiconductors", Device Class L2=Transistors, Device Class L3=MOSFETs, Digikey Description="MOSFET N-CH 20V 0.63A SOT23-3", Drain To Source Voltage=20V, Footprint Url=https://www.diodes.com/assets/Package-Files/SOT23.pdf, Gate Charge At Vgs="0.9nC @ 4.5V", Height=1.1mm, Lead Free=Yes, Manufacturer Part Number=DMN2004K-7, Mouser Description="MOSFET 20V 540mA", Number Of Channels=1, Number Of N Channels=1, Octopart=https://octopart.com/dmn2004k-7-diodes+inc.-7127688, Reverse Recovery Charge=0.85nC, Reverse Recovery Time=5.5ns, RoHS=TRUE, Rthja Max=357°C/W, Standoff Height=0.013mm, Temperature Range High=+150°C, Threshold Vgs Max=1V, Threshold Vgs Min=0.5V, Turn Off Delay Time=59.4ns, Turn On Delay Time=5.7ns
R1 R18 R21 R25: library part CMP-26527-003681-1, "300Ω ±5% 0.125W 0805 Thick Film Chip Resistor AEC-Q200 compliant, RMCF0805JT300R", Case Code (Imperial)=0805, Case Code (Metric)=2012, Max Operating Temperature=155°C, Max Power Dissipation=125mW, Min Operating Temperature=-55°C, Package Quantity=5000, Resistance=300R, Resistor Type="Thick Film", Temperature Coefficient=200ppm/°C, Tolerance=5%, Case/Package=0805, Contact Plating=Tin, Features="Automotive AEC-Q200", Height=0.026inch, Length=0.079inch, Mount="Surface Mount", Number of Terminations=2, Packaging="Tape and Reel", Radiation Hardening=No, RoHS Compliant=Yes, Series=RMCF, Width=0.049inch
R2 R3 R4 R5 R6 R7 R8 R9 R10 R11: library part CMP-26527-003818-1, "100kΩ ±1% 0.125W 0805 Thick Film Chip Resistor AEC-Q200 compliant, RMCF0805FG100K", Case Code (Imperial)=0805, Case Code (Metric)=2012, Max Operating Temperature=155°C, Max Power Dissipation=125mW, Min Operating Temperature=-55°C, Package Quantity=10000, Resistance=100kR, Resistor Type="Thick Film", Temperature Coefficient=100ppm/°C, Tolerance=1%, Case/Package=0805, Construction=Rectangular, Contact Plating=Tin, Depth=1.25mm, Features="Automotive AEC-Q200", Height=0.026inch, Length=0.079inch, Military Standard=Not, Mount="Surface Mount", Number of Terminations=2, Packaging="Tape and Reel", Radiation Hardening=No, RoHS Compliant=Yes, Series=RMCF, Width=0.049inch
R12: library part CMP-26527-006913-1, "3kΩ ±5% 0.125W 0805 Thick Film Chip Resistor AEC-Q200 compliant", Case Code (Imperial)=0805, Case Code (Metric)=2012, Max Operating Temperature=155°C, Max Power Dissipation=125mW, Min Operating Temperature=-55°C, Resistance=3kR, Resistor Type="Thick Film", Temperature Coefficient=200ppm/°C, Tolerance=5%, Case/Package=0805, Construction=Rectangular, Contact Plating=Tin, Depth=1.25mm, Features="Automotive AEC-Q200", Height=0.026inch, Length=0.079inch, Military Standard=Not, Mount="Surface Mount", Number of Terminations=2, Packaging="Tape and Reel", Radiation Hardening=No, RoHS Compliant=Yes, Series=RMCF, Width=0.049inch
R13: library part CMP-26527-003681-1, "300Ω ±5% 0.125W 0805 Thick Film Chip Resistor AEC-Q200 compliant", Case Code (Imperial)=0805, Case Code (Metric)=2012, Max Operating Temperature=155°C, Max Power Dissipation=125mW, Min Operating Temperature=-55°C, Package Quantity=5000, Resistance=300R, Resistor Type="Thick Film", Temperature Coefficient=200ppm/°C, Tolerance=5%, Case/Package=0805, Contact Plating=Tin, Features="Automotive AEC-Q200", Height=0.026inch, Length=0.079inch, Mount="Surface Mount", Number of Terminations=2, Packaging="Tape and Reel", Radiation Hardening=No, RoHS Compliant=Yes, Series=RMCF, Width=0.049inch
R14: library part CMP-26527-003818-1, "100kΩ ±1% 0.125W 0805 Thick Film Chip Resistor AEC-Q200 compliant", Case Code (Imperial)=0805, Case Code (Metric)=2012, Max Operating Temperature=155°C, Max Power Dissipation=125mW, Min Operating Temperature=-55°C, Package Quantity=10000, Resistance=100kR, Resistor Type="Thick Film", Temperature Coefficient=100ppm/°C, Tolerance=1%, Case/Package=0805, Construction=Rectangular, Contact Plating=Tin, Depth=1.25mm, Features="Automotive AEC-Q200", Height=0.026inch, Length=0.079inch, Military Standard=Not, Mount="Surface Mount", Number of Terminations=2, Packaging="Tape and Reel", Radiation Hardening=No, RoHS Compliant=Yes, Series=RMCF, Width=0.049inch
R15: library part CMP-26527-000121-1, "RES 10K OHM 1% 1/8W 0805", Case Code (Imperial)=0805, Case Code (Metric)=2012, Max Operating Temperature=155°C, Max Power Dissipation=125mW, Min Operating Temperature=-55°C, Resistance=10kR, Resistor Type="Thick Film", Temperature Coefficient=100ppm/°C, Tolerance=1%, Case/Package=0805, Construction=Rectangular, Contact Plating=Tin, Depth=1.25mm, Features="Automotive AEC-Q200", Height=0.026inch, Lead Free="Lead Free", Length=2mm, Military Standard=Not, Mount="Surface Mount", Number of Terminations=2, Packaging="Tape and Reel", Power Rating=125mW, Radiation Hardening=No, RoHS Compliant=Yes, Series=RMCF, Size Code=0805, Width=0.049inch
R16: library part CMP-26527-002331-1, "1kΩ ±1% 0.125W 0805 Thick Film Chip Resistor AEC-Q200 compliant", Case Code (Imperial)=0805, Case Code (Metric)=2012, Max Operating Temperature=155°C, Max Power Dissipation=125mW, Min Operating Temperature=-55°C, Resistance=1kR, Resistor Type="Thick Film", Temperature Coefficient=100ppm/°C, Tolerance=1%, Case/Package=0805, Construction=Rectangular, Contact Plating=Tin, Depth=1.25mm, Features="Automotive AEC-Q200", Height=0.026inch, Lead Free="Lead Free", Length=2mm, Military Standard=Not, Mount="Surface Mount", Number of Terminations=2, Packaging="Tape and Reel", Power Rating=125mW, Radiation Hardening=No, RoHS Compliant=Yes, Series=RMCF, Size Code=0805, Width=0.049inch
R17: library part CMP-2001-00434-1, Manufacturer=Panasonic, Part Number=ERJ-6GEYJ563V
R19 R22 R27: library part CMP-26527-001731-1, "100Ω ±1% 0.125W 0805 Thick Film Chip Resistor AEC-Q200 compliant, RMCF0805FT100R", Case Code (Imperial)=0805, Case Code (Metric)=2012, Max Operating Temperature=155°C, Max Power Dissipation=125mW, Min Operating Temperature=-55°C, Power Rating=250mW, Resistance=100R, Resistor Type="Thick Film", Temperature Coefficient=100ppm/°C, Tolerance=1%, Case/Package=0805, Construction=Rectangular, Contact Plating=Tin, Depth=1.25mm, Features="Automotive AEC-Q200", Height=0.026inch, Lead Free="Lead Free", Length=2mm, Military Standard=Not, Mount="Surface Mount", Number of Terminations=2, Packaging="Tape and Reel", Radiation Hardening=No, RoHS Compliant=Yes, Series=RMCF, Size Code=0805, Width=0.049inch
R20 R23 R24 R26 R28 R29: library part CMP-26527-000121-1, "RES 10K OHM 1% 1/8W 0805, RMCF0805FT10K0", Case Code (Imperial)=0805, Case Code (Metric)=2012, Max Operating Temperature=155°C, Max Power Dissipation=125mW, Min Operating Temperature=-55°C, Resistance=10kR, Resistor Type="Thick Film", Temperature Coefficient=100ppm/°C, Tolerance=1%, Case/Package=0805, Construction=Rectangular, Contact Plating=Tin, Depth=1.25mm, Features="Automotive AEC-Q200", Height=0.026inch, Lead Free="Lead Free", Length=2mm, Military Standard=Not, Mount="Surface Mount", Number of Terminations=2, Packaging="Tape and Reel", Power Rating=125mW, Radiation Hardening=No, RoHS Compliant=Yes, Series=RMCF, Size Code=0805, Width=0.049inch
SW1: library part CMP-71745-000011-1, "SWITCH SLIDE DPDT 200MA 12V", Current Rating=200mA, Max Operating Temperature=85°C, Min Operating Temperature=-40°C, Operating Force=153gf, Voltage Rating (DC)=12V, Actuator Length=2mm, Actuator Material=Nylon, Actuator Type=Standard, Contact Material=Copper, Contact Plating=Silver, Contact Style=Non-Shorting, Electrical Life=10000Cycles, Mount="Surface Mount", Packaging="Cut Tape", Series=CL-SB, Switch Function=On-On, Switch Travel=2mm, Throw Configuration=DPDT
SW2 SW3 SW4: library part CMP-03402-000004-1, "SWITCH TACTILE SPST-NO 0.05A 24V", Contact Current Rating=50mA, Contact Resistance=100mΩ, Manufacturer="TE Connectivity", Operating Force=160gf, Temperature="-35°C to +85°C", Temperature Range High=+85°C, Temperature Range Low=-35°C, Voltage Rating Dc=24V, Automotive=No, Category=Switch, ComponentLink2Description=Datasheet, ComponentLink2URL=https://www.te.com/commerce/DocumentDelivery/DDEController?Action=showdoc&DocId=Customer+Drawing%7F1825910%7FC10%7Fpdf%7FEnglish%7FENG_CD_1825910_C10.pdf%7F2-1825910-7, Device Class L1=Electromechanical, Device Class L2=Switches, Device Class L3="Pushbutton Switches", Digikey Description="SWITCH TACTILE SPST-NO 0.05A 24V", Electromechanical Life=100000Cycles, Height=13.3mm, Lead Free=Yes, Manufacturer Part Number=2-1825910-7, Mount="Through Hole", Mouser Description="Switch Tactile OFF (ON) SPST Extended Round Button PC Pins 0.05A 24VDC 100000Cycles 1.57N Thru-Hole Loose", Octopart=https://octopart.com/2-1825910-7-te+connectivity-42270510, Package=2-1825910-7, RoHS=TRUE, Throw Configuration=SPST-NO
U1 U2: library part CMP-1310-00171-1, "Single Supply Quad Operational Amplifier, 3 to 32 V, 0 to 70 degC, 14-Pin SOIC, Pb-Free, Tape and Reel", Manufacturer="On Semiconductor", ComponentLink1Description="Manufacturer URL", ComponentLink1URL=http://www.onsemi.com/, ComponentLink2Description=Datasheet, ComponentLink2URL=http://www.onsemi.cn/pub_link/Collateral/LM324-D.PDF, ComponentLink3Description="Package Specification", ComponentLink3URL=http://www.onsemi.com/pub_link/Collateral/751A-03.PDF, DatasheetVersion="Rev. 25", Mounting Technology="Surface Mount", PackageDescription="14-Pin Small Outline Integrated Circuit, Body 8.65 x 3.9 mm, Pitch 1.27 mm", PackageReference=SOIC-14-751A-03, PackageVersion="Rev. K, 05/2011", Packing="Tape and Reel", PartNumber=LM324DR2G, RoHS=TRUE, VCC Max (V)=32, VCC Min (V)=3
U3: library part CMP-0244-00307-2, "IC REG LINEAR 3.3V 800MA SOT223", Case/Package=SOT-223, Dropout Voltage=1.1V, Input Bias Current=5mA, Max Input Voltage=15V, Max Operating Temperature=125°C, Max Output Current=1.3A, Max Output Voltage=3.3V, Max Power Dissipation=12W, Min Input Voltage=5.3V, Min Operating Temperature=-40°C, Output Current=950mA, Output Voltage Accuracy=1%, Package Quantity=1, Quiescent Current=10mA, Accuracy=1%, Contact Plating=Tin, Height=1.8mm, Lead Free="Lead Free", Length=6.5mm, Max Supply Voltage=15V, Min Output Voltage=3.3V, Min Supply Voltage=3.3V, Mount="Surface Mount", Nominal Output Voltage=3.3V, Number of Outputs=1, Number of Pins=4, Number of Regulators=1, Number of Terminals=4, Output Type=Fixed, Output Voltage=3.3V, Packaging="Tape and Reel", Polarity=Positive, Power Dissipation=12W, Radiation Hardening=No, REACH SVHC="No SVHC", Termination=SMD/SMT, Weight=0.01lb, Width=3.5mm

## Via types
v1: diameter 0.6, hole 0.3, Top Layer to Bottom Layer, 37 vias
v2: diameter 3.6, hole 3.2, Top Layer to Bottom Layer, 3 vias

## Nets (pads, with @x,y where several pads share a name; then routed paths per layer and width w, separated by ;. In a path a pad name is that pad's centre, name@x,y a point inside that pad or via, vN(x,y) a via of type N, cw(c..) or ccw(c..) an arc to the next point about the centre after c; other vN are vias at no path point)
0: J12.7
2: J12.6
4: J12.8 R16.1 | length 39
  Top Layer w0.508: v1(19.685,40.64) 19.685,40.665 19.65,40.7 19.65,62.93 J12.8@19.685,62.965
  Bottom Layer w0.508: R16.1@14.224,26.264 14.224,31.584 18.276,35.636 18.276,39.231 v1(19.685,40.64)
5: J12.11
12: J11.13 R26.1 SW3.2 | length 40.3
  Top Layer w0.203: J11.13 19.65,35.214 22.75,32.114 v1(22.75,11)
  Bottom Layer w0.203: v1(22.75,11) 22.75,2.722 SW3.2@23.876,1.596 ; SW3.2 25.689,1.25 26.084,1.645 R26.1
13: J11.15 R29.1 SW4.2 | length 49.6
  Top Layer w0.203: J11.15@14.605,36.537 21.75,29.392 v1(21.75,13) ; J11.15@14.605,36.664 J11.15@14.656,36.664
  Bottom Layer w0.203: SW4.2 10.703,1.25 11.176,1.723 R29.1@12.446,1.723 ; R29.1 12.7,1.7 13.739,2.739 21.209,2.739 21.75,3.28 v1(21.75,13)
14: J11.12 R24.1 SW2.2 | length 52.5
  Top Layer w0.203: J11.12@22.098,36.791 23.749,35.14 v1(23.75,9)
  Bottom Layer w0.203: v1(23.75,9) 23.75,8.29 25.908,6.132 25.908,3.556 26.897,2.567 37.933,2.567 SW2.2@39.243,1.257 ; SW2.2 40.545,1.25 41.018,1.723 R24.1@42.5,1.723
15: J12.5
16: J12.9
17: J12.10
18: J12.12
19: J12.13
21: J12.15 P1.3 | length 25.8
  Top Layer w0.203: P1.3 41.021,56.251 41.021,59.778 38.164,62.635 38.152,62.635 37.786,63 J12.15
22: J12.18 P1.4 | length 24.7
  Top Layer w0.203: P1.4 45.05,57.74 J12.18
23: 22.1 J12.19 | length 21.6
  Top Layer w0.508: 22.1@28.829,56.222 28.829,56.329 28.896,56.396 29.003,56.396 30.107,57.5 v1(32.75,57.5)
  Bottom Layer w0.508: v1(32.75,57.5) 35.917,60.667 45.257,60.667 47.543,62.953 J12.19@47.625,62.953
25: J11.9 R22.1 R23.1 | length 42.2
  Top Layer w0.203: J11.9 29.81,24.618 35.452,18.976 v1@35.452,17.825
  Bottom Layer w0.203: v1(35.5,18) 45.636,18 48.719,14.917 48.725,14.917 48.893,14.75 v1(49,14.75) ; R23.1@47,13.601 47.863,13.601 49.022,14.76 50,13.782 R22.1
26: J11.10 R27.1 R28.1 | length 30.9
  Top Layer w0.203: J11.10@27.27,36.756 27.287,36.738 27.287,25.506 34,18.793 v1(34,17.25)
  Bottom Layer w0.203: R28.1 33.068,13.8 34.018,14.75 35.25,13.518 R27.1@35.25,11.527 ; v1(34,14.75) v1(34,17.25)
27: J11.11 R19.1 R20.1 | length 43.8
  Top Layer w0.203: J11.11 24.73,26.451 32.512,18.669 v1@32.512,16.464
  Bottom Layer w0.203: R20.1@17,13.561 17.025,13.586 17.836,13.586 v1(19,14.75) 19.076,14.826 22.829,14.826 24.474,16.471 v1@32.5,16.471 ; v1@19.084,14.726 20,13.81 R19.1
  other v1: 32.5,16.5
32: C6.2 J3.1 J11.7 U2.6 U2.7 | length 14.9
  Top Layer w0.203: J11.7 34.89,40.351 35.39,40.851 J3.1
  Bottom Layer w0.203: J3.1@36,43 39.32,43 C6.2 39.44,43.12 U2.7 U2.6
33: C1.2 J2.1 J11.8 U1.6 U1.7 | length 40.6
  Top Layer w0.203: J2.1@2.73,42.355 6.389,38.696 31.369,38.696 32.35,37.715 J11.8
  Bottom Layer w0.203: J2.1@2.73,42.735 3.981,43.986 C1.2 U1.7 U1.6
34: C17.1 J11.5 R15.2 R17.2 | length 48.8
  Top Layer w0.254: v1@18.034,28.155 13.335,32.854 13.335,37.172 13.952,37.789 30.625,37.789 31.08,37.334 31.08,36.191 31.56,35.711 38.931,35.711 J11.5
  Bottom Layer w0.254: v1(18.098,28.165) 18.098,28.071 18.542,27.627 R15.2@18.542,27.115 ; R15.2@18.161,27.115 18.484,26.792 R15.2 ; R15.2@19.186,26.782 21.51,26.782 22.539,27.811 C17.1 22.539,31.016 R17.2
35: C11.2 J4.1 J11.6 U2.13 U2.14 | length 37.5
  Top Layer w0.203: J11.6 37.442,36.762 37.442,37.696 38.481,38.735 43.942,38.735 ; J4.1@43.942,29.044 43.942,38.735 ; v1(45.593,50.38) 43.942,48.729 43.942,38.735
  Bottom Layer w0.203: v1(45.593,50.38) 45.593,50.393 46.872,51.672 46.872,51.972 U2.14 ; U2.13 U2.14 ; C11.2 U2.14
+3V3: 22.5 C3.1 C9.1 C16.1 D1.2 D4.2 D7.2 D8.2 D9.2 J7.1 J11.16 J11.17 J11.18 P1.1 R2.1 R6.1 SW2.3 SW3.3 SW4.3 U1.11 U2.11 U3.2 U3.4 | length 225.7
  Top Layer w0.508: J11.18 J11.17@9.439,36.75 ; J11.17@9.398,36.791 J11.17@9.439,36.75 ; J11.16 J11.17 J11.17@9.439,36.75 ; D7.2 13.77,13.985 v1(16.383,16.598) ; v1(21.755,53.5) 21.78,53.5 21.962,53.682 25.527,53.682 22.5@26.23,54.385 ; 22.5 26.23,54.507 26.289,54.448 26.289,54.444 27.013,53.72 34.416,53.72 37.338,56.642 v1(40.386,56.642) ; v1(28.702,17.725) 28.702,13.568 D9.2 ; v1(42.799,18.757) 43.77,17.786 ; 43.77,17.741 43.77,13.535 D8.2@43.815,13.49
  Bottom Layer w0.508: C3.1 4.814,52.082 6.135,50.761 9.017,50.761 U1.11@10.033,51.777 ; R2.1 10,57.776 ; U1.11 10,57.776 ; U1.11@10.036,51.777 10.036,51.393 10.668,50.761 16.736,50.761 D1.2 18.657,52.682 18.657,52.917 19.24,53.5 v1(21.755,53.5) 23.69,51.565 P1.1 ; R6.1 10,57.776 ; J11.16@12.071,36.791 14.024,38.744 16.177,38.744 21.433,44 P1.1 ; D7.2 13.77,10.604 14.106,10.268 14.106,8.47 15.713,6.863 15.713,5.604 SW4.3@15.748,5.568 ; v1(16.383,16.598) 23.437,16.598 24.072,17.233 28.201,17.233 28.693,17.725 v1(28.702,17.725) 29.734,18.757 v1(42.799,18.757) 42.799,27.266 J7.1 41.136,29.667 41.136,37.233 38.872,39.497 28.193,39.497 P1.1 ; U3.4 28.702,22.671 v1@28.702,17.75 ; D9.2 28.77,10.604 29.106,10.268 29.106,8.47 30.713,6.863 30.713,5.808 SW3.3@30.734,5.787 ; U3.2 34.739,22.883 33.528,24.095 33.528,26.206 33.826,26.504 36.411,26.504 D4.2 38.586,25.321 40.947,25.321 C16.1 40.988,25.464 40.767,25.685 40.767,28.917 J7.1@40.513,29.171 ; v1(40.386,56.642) 41.021,56.007 41.021,54.864 43.214,52.671 43.214,52.196 U2.11 ; U2.11@43.307,51.904 43.307,50.634 44.98,48.961 C9.1@50.895,48.961 ; D8.2@43.655,13.5 D8.2 43.77,10.604 44.106,10.268 44.106,8.456 45.706,6.857 45.706,5.794 SW2.3
+5V: J11.19 J11.20 | length 2.7
  Top Layer w0.508: J11.20@1.778,36.664 1.864,36.75 J11.19
EN: J11.2
GND: 22.3 B-1.1 C3.2 C5.2 C9.2 C10.2 C14.2 C15.2 C16.2 C17.2 D5.2 J4.2 J4.3 J6.2 J6.3 J8.2 J9.1 J11.14 J12.1 J12.2 J12.3 J12.4 J12.14 P1.2 Q2.2 Q3.2 Q4.2 Q5.2 R1.2 R5.2 R7.2 R12.1 R13.2 R17.1 R20.2 R23.2 R24.2 R26.2 R28.2 R29.2 U1.4 U2.4 U3.1 | length 187.3
  Top Layer w0.508: J12.1 3.11,61.76 3.17,61.76 ; v1@3.178,57.749 3.178,61.752 3.17,61.76 ; J12.2 3.17,61.76 ; J12.2@4.428,62.936 4.492,63 J12.3 J12.4 ; v1@22.792,57.492 26.797,57.492 27.374,56.915 27.374,55.645 22.3@27.559,55.46 ; J9.1 37.722,28.445 40.806,25.361 51.469,25.361 J4.3 51.64,32.678 J4.2@51.689,32.727 ; v1(45.339,45.554) v1(49.657,45.554)
  Bottom Layer w0.508: v1@3.15,57.761 6.175,57.761 R5.2 ; v1(3.175,57.746) 3.175,54.329 C3.2 3.535,53.969 3.535,53.492 3.556,53.471 3.556,51.943 6.35,49.149 8.47,49.149 9.964,47.655 9.964,46.876 U1.4 ; J6.2 4.5,28.246 J6.2@5.189,28.935 ; R5.2@6.477,57.909 7.33,58.762 12.687,58.762 13.689,57.76 R7.2 22.465,57.76 v1@22.72,57.505 ; J6.3@7.215,33.035 J6.3 ; U1.4@10.033,46.824 10.033,46.507 10.675,45.865 C5.2 ; v1@12.065,7.14 12.065,4.235 12.104,4.196 12.104,3.996 12.3,3.8 R29.2 R29.2@12.528,3.772 ; v1@12.065,7.394 12.065,8.565 13.2,9.7 Q3.2 ; R20.2 17.126,11.504 v1@17.148,9.25 ; J11.14@17.018,36.842 J11.14@17.018,36.918 ; v1(17.145,32.893) v1(18.669,34.417) ; Q2.2 19.762,31.943 20.529,31.176 21.61,32.257 26.591,32.257 27.879,30.969 D5.2 28.65,30.498 29.28,30.498 29.806,29.972 32.91,29.972 ; v1(19.177,29.425) 19.202,29.425 19.456,29.679 20.529,29.679 ; R17.1 20.529,29.679 ; C17.2 21.039,28.211 20.818,28.432 20.818,29.39 20.529,29.679 ; R1.2 v1@22.72,57.505 ; v1(22.75,57.5) 22.725,57.5 v1@22.72,57.505 ; v1@27.001,7.392 27.001,8.501 28.2,9.7 Q5.2 ; v1@27.051,7.267 27.051,4.194 27.104,4.141 27.104,3.941 27.3,3.745 R26.2 ; R26.2@27.473,3.772 R26.2 ; R26.2@27.528,3.772 R26.2 ; R28.2 32.131,11.504 v1@32.131,9.299 ; C15.2@34.417,28.551 C15.2 ; U3.1 35.039,25.183 35.385,24.837 35.385,24.516 36.947,22.955 ; J9.1 37.196,32.473 35.799,31.075 34.589,31.075 R12.1 34.224,31.286 32.91,29.972 ; R13.2 40.917,21.919 40.594,22.242 40.594,22.346 40.081,22.859 40.081,22.955 ; C16.2 40.89,23.964 40.669,23.743 40.669,23.543 40.081,22.955 ; v1@41.987,7.392 41.987,8.487 43.2,9.7 Q4.2 ; v1@42.037,7.267 42.037,4.263 42.104,4.196 42.104,3.996 42.3,3.8 R24.2 R24.2@42.472,3.772 ; v1(42.037,45.173) 42.055,45.191 42.682,45.191 43.046,45.554 43.18,45.554 ; U2.4 43.25,44.541 C10.2@43.471,44.32 ; C10.2 43.782,44.541 44.326,44.541 v1(45.339,45.554) ; v1(43.815,53.594) 43.801,53.594 42.799,54.596 42.799,57.614 43.097,57.912 44.507,57.912 C14.2 ; R23.2@47,11.501 47.176,11.325 47.176,9.315 v1@47.194,9.297 ; v1(49.657,45.554) 50.546,46.443 C9.2 ; 32.91,29.972 33.111,29.972 34.036,29.047 34.036,28.612 C15.2 ; C15.2 34.036,28.17 34.036,27.901 32.639,26.504 32.639,23.209 34.17,21.678 35.687,21.678 36.955,22.946 36.947,22.955 ; 36.947,22.955 40.081,22.955
  other v1: 12.065,7.25 27.001,7.25 41.987,7.25 17.145,9.25 32.131,9.25 47.194,9.25
NetB+1_1: B+1.1 J8.1 Q1.3 R14.1 SW1.2 | length 37
  Bottom Layer w0.508: 2.5,4.127 2.5,5.912 2.75,6.162 J8.1 ; J8.1@2.794,8.475 2.794,11.137 1.27,12.661 1.27,16.62 2.609,17.959 SW1.2@2.891,17.959 ; SW1.2 4.191,19.341 4.191,21.419 4.489,21.717 10.079,21.717 10.753,21.043 15.079,21.043 16.129,19.993 16.129,24.489 16.352,24.712 R14.1
NetC1_1: C1.1 R3.2 R4.1 | length 14.5
  Bottom Layer w0.203: C1.1 6.19,41.356 7.931,39.615 14.307,39.615 14.791,40.1 14.791,40.59 R4.1@15.276,41.075 ; R4.1 R4.1@15.276,41.075 ; R3.2 R4.1@15.276,41.075
NetC5_1: C5.1 R4.2 U1.5 | length 9.7
  Bottom Layer w0.203: U1.5 8.73,43.595 C5.1 8.825,43.275 11.071,41.029 13.348,41.029 13.724,40.654 R4.2
NetC6_1: C6.1 R8.2 R9.1 | length 8.6
  Bottom Layer w0.203: C6.1 41.474,43.304 46.412,43.304 46.531,43.185 46.531,43.1 46.906,42.724 R8.2 47.06,40.825 R9.1
NetC10_1: C10.1 R9.2 U2.5 | length 12.3
  Bottom Layer w0.203: U2.5 41.98,46.54 40.259,44.819 40.259,42.405 40.604,42.06 43.603,42.06 44.117,42.575 44.342,42.575 44.573,42.345 44.573,41.914 45.833,40.654 R9.2
NetC11_1: C11.1 R10.2 R11.1 | length 14.2
  Bottom Layer w0.203: R10.2 37.959,58.236 R11.1 37.945,58.404 39.32,59.778 45.847,59.778 47.039,58.586 47.039,57.946 C11.1
NetC14_1: C14.1 R11.2 U2.12 | length 14.1
  Bottom Layer w0.203: R11.2 39.497,58.404 40.236,59.143 45.339,59.143 45.72,58.762 45.72,57.591 45.113,56.984 45.113,56.448 44.739,56.075 C14.1 U2.12
NetC15_1: C15.1 D3.2 D5.1 F1.2 U3.3 | length 18.6
  Bottom Layer w0.254: D5.1 25.927,30.371 26.573,30.371 28.479,28.465 F1.2 28.578,28.166 D3.2 31.877,26.98 ; C15.1 32.432,28.066 32.432,27.535 31.877,26.98 ; U3.3 33.48,20.583 31.877,22.186 31.877,26.98
NetD1_1: D1.1 R1.1 | length 2.8
  Bottom Layer w0.508: D1.1@18.072,55.634 18.124,55.686 R1.1@20.879,55.686
NetD2_1: D2.1 D6.1 F1.1 | length 7
  Bottom Layer w0.254: D2.1@20.962,25.107 D6.1 ; D6.1@24.638,25.114 24.638,27.874 F1.1
NetD2_2: D2.2 J5.1 SW1.1 | length 22.9
  Bottom Layer w0.254: SW1.1@3.052,15.408 4.318,16.673 4.318,18.463 5.159,19.304 18.466,19.304 19.062,19.9 19.939,19.9 21.013,20.974 D2.2@21.013,22.541
NetD3_1: D3.1 R12.2 | length 2.1
  Bottom Layer w0.508: D3.1 30.804,31.553 32.56,31.553 R12.2
NetD4_1: D4.1 R13.1 | length 3.4
  Bottom Layer w0.203: D4.1 39.759,21.325 40.917,20.167 R13.1
NetD6_2: D6.2 J10.1 SW1.4 | length 25.1
  Bottom Layer w0.254: SW1.4@5.502,15.963 8.128,15.963 9.779,17.614 23.368,17.614 J10.1 25.654,21.848 D6.2@24.688,22.814
NetD7_1: D7.1 R18.1 | length 3.2
  Bottom Layer w0.203: R18.1 10.604,10.626 11.23,11.252 D7.1
NetD8_1: D8.1 R21.1 | length 3.2
  Bottom Layer w0.203: R21.1 40.604,10.626 41.23,11.252 D8.1
NetD9_1: D9.1 R25.1 | length 3.2
  Bottom Layer w0.203: R25.1 25.604,10.626 26.23,11.252 D9.1
NetJ6_1: J6.1 SW1.5 | length 13.4
  Top Layer w0.508: v1@7.511,18.013 10.541,21.043 J6.1@10.541,28.028